# Altium PCB PIC精简开发板.PCBDOC (part 2 of 2)
Units mm, origin at the board's own origin, x right, y up, seen from the top; angles counter-clockwise.
Board outline 152.4 x 101.6 mm, 2 copper layers (Top Layer, Bottom Layer); 40 components, 58 nets, 198 pads, 47 vias.
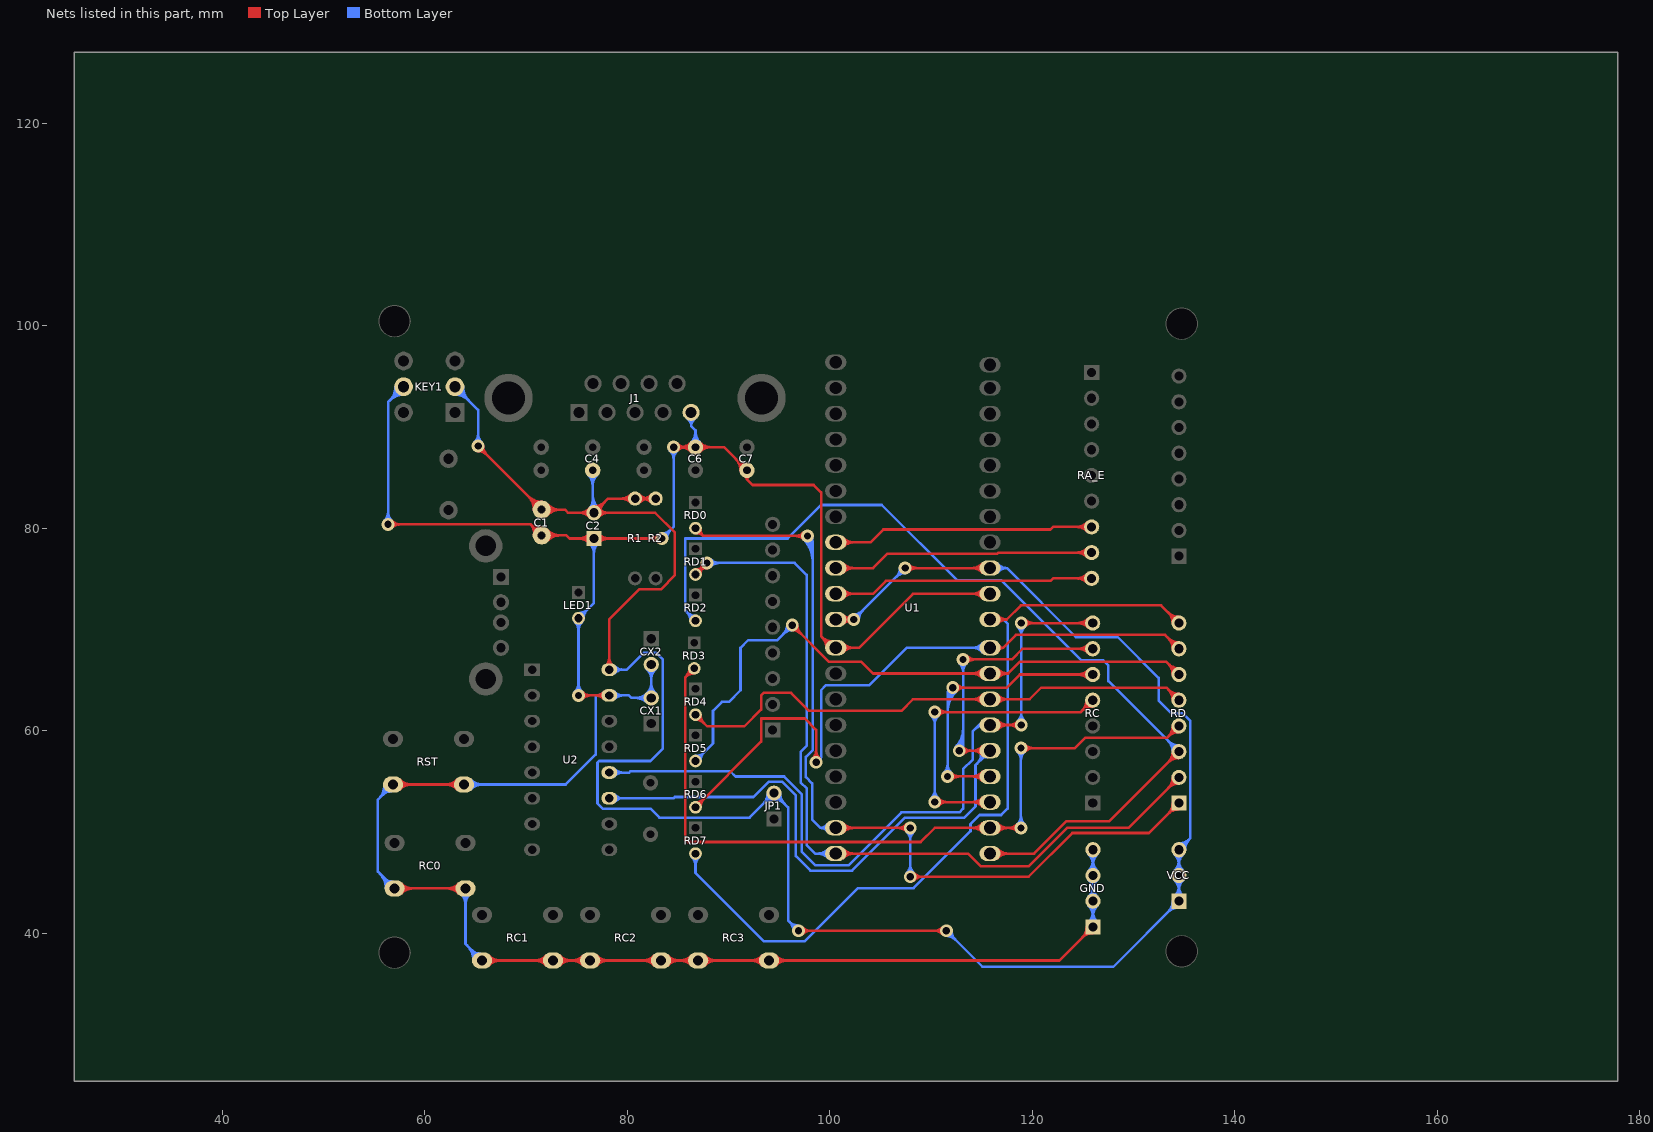
[diagram p2: the nets of this part, all layers, seen from the top]

## Via types
v1: diameter 1.27, hole 0.711, Top Layer to Bottom Layer, 47 vias

## Nets (pads, with @x,y where several pads share a name; then routed paths per layer and width w, separated by ;. In a path a pad name is that pad's centre, name@x,y a point inside that pad or via, vN(x,y) a via of type N, cw(c..) or ccw(c..) an arc to the next point about the centre after c; other vN are vias at no path point) (continued)
RC4: RC.5 U1.23 | length 45.7
  Top Layer w0.254: v1(110.363,52.959) U1.23@115.824,52.959 ; v1(110.363,61.849) 124.787,61.849 RC.5@125.961,63.023 ; v1@110.722,52.6 cw(c111.589,51.733) 111.589,52.959 cw(c111.589,54.185) v1@110.722,53.318 ; v1@110.722,61.49 cw(c111.589,60.623) 111.589,61.849 cw(c111.589,63.075) v1@110.722,62.208 ; U1.23@115.082,52.517 ccw(c114.014,51.449) 114.014,52.959 ccw(c114.014,54.469) U1.23@115.082,53.401 ; U1.23@115.261,52.696 ccw(c114.627,52.062) 114.627,52.959 ccw(c114.627,53.856) U1.23@115.261,53.222 ; RC.5@125.338,63.023 cw(c123.834,63.023) 124.897,61.959 cw(c125.961,60.896) RC.5@125.961,62.4 ; RC.5@125.592,63.023 cw(c124.701,63.023) 125.331,62.393 cw(c125.961,61.763) RC.5@125.961,62.654
  Bottom Layer w0.254: v1@110.004,53.318 ccw(c109.137,54.185) 110.363,54.185 ccw(c111.589,54.185) v1@110.722,53.318 ; v1@110.004,61.49 cw(c109.137,60.623) 110.363,60.623 cw(c111.589,60.623) v1@110.722,61.49 ; v1(110.363,52.959) v1(110.363,61.849)
RC5: RC.6 U1.24 | length 47.9
  Top Layer w0.254: v1(111.633,55.499) U1.24@115.824,55.499 ; v1@111.992,55.14 cw(c112.859,54.273) 112.859,55.499 cw(c112.859,56.725) v1@111.992,55.858 ; v1(112.141,64.262) 117.475,64.262 118.776,65.563 RC.6@125.961,65.563 ; v1@112.5,63.903 cw(c113.367,63.036) 113.367,64.262 cw(c113.367,65.488) v1@112.5,64.621 ; U1.24@115.082,55.057 ccw(c114.014,53.989) 114.014,55.499 ccw(c114.014,57.009) U1.24@115.082,55.941 ; U1.24@115.261,55.236 ccw(c114.627,54.602) 114.627,55.499 ccw(c114.627,56.396) U1.24@115.261,55.762 ; RC.6@125.52,65.122 ccw(c124.457,64.059) 124.457,65.563 ccw(c124.457,67.067) RC.6@125.52,66.004 ; RC.6@125.7,65.302 ccw(c125.07,64.672) 125.07,65.563 ccw(c125.07,66.454) RC.6@125.7,65.824
  Bottom Layer w0.254: v1@111.274,55.858 ccw(c110.407,56.725) 111.633,56.725 ccw(c112.859,56.725) v1@111.992,55.858 ; v1(111.633,55.499) 111.633,63.754 ; 111.633,61.809 cw(c114.594,61.809) v1@112.5,63.903 ; 111.633,62.422 cw(c113.981,62.422) v1@112.321,64.082 ; 111.633,63.036 cw(c113.367,63.036) v1(112.141,64.262) 111.633,63.754 ; 111.633,63.649 cw(c112.754,63.649) v1@111.961,64.442 ; v1@111.683,64.043 cw(c111.453,63.934) 111.633,63.754 ; v1@111.922,63.804 ccw(c111.813,63.574) 111.633,63.754
RC6: RC.7 U1.25 U2.11 | length 100.7
  Top Layer w0.254: v1(112.776,58.039) U1.25@115.824,58.039 ; v1@113.135,57.68 cw(c114.002,56.813) 114.002,58.039 cw(c114.002,59.265) v1@113.135,58.398 ; v1(113.157,67.056) 117.983,67.056 119.03,68.103 RC.7@125.961,68.103 ; v1@113.516,66.697 cw(c114.383,65.83) 114.383,67.056 cw(c114.383,68.282) v1@113.516,67.415 ; U1.25@115.082,57.597 ccw(c114.014,56.529) 114.014,58.039 ccw(c114.014,59.549) U1.25@115.082,58.481 ; U1.25@115.261,57.776 ccw(c114.627,57.142) 114.627,58.039 ccw(c114.627,58.936) U1.25@115.261,58.302 ; RC.7@125.52,67.662 ccw(c124.457,66.599) 124.457,68.103 ccw(c124.457,69.607) RC.7@125.52,68.544 ; RC.7@125.7,67.842 ccw(c125.07,67.212) 125.07,68.103 ccw(c125.07,68.994) RC.7@125.7,68.364
  Bottom Layer w0.254: U2.11@78.228,53.339 84.582,53.339 84.71,53.467 92.468,53.467 93.98,54.979 95.262,54.979 96.647,53.594 96.647,47.63 98.074,46.203 102.21,46.203 107.442,51.435 113.284,51.435 114.391,52.542 114.391,56.606 U1.25@115.824,58.039 ; U2.11@78.743,52.987 cw(c79.593,52.137) 79.593,53.339 cw(c79.593,54.541) U2.11@78.743,53.691 ; v1@112.417,58.398 ccw(c110.63,60.185) 113.157,60.185 ; v1@112.596,58.219 ccw(c111.243,59.572) 113.157,59.572 ; v1@112.798,66.697 cw(c111.931,65.83) 113.157,65.83 cw(c114.383,65.83) v1@113.516,66.697 ; 113.157,58.959 cw(c111.856,58.959) v1(112.776,58.039) 113.157,58.42 v1(113.157,67.056) ; 114.541,56.756 ccw(c113.602,57.694) U1.25@114.908,57.928 ; 114.884,57.099 ccw(c114.185,57.799) U1.25@115.158,57.973 ; 114.969,57.184 cw(c115.524,56.628) U1.25@115.524,57.414
RC7: RC.8 U1.26 U2.12 | length 94.6
  Top Layer w0.254: U1.26@115.824,60.579 v1(118.903,60.579) ; U1.26@116.387,60.316 cw(c117.021,59.682) 117.021,60.579 cw(c117.021,61.476) U1.26@116.387,60.842 ; U1.26@116.566,60.137 cw(c117.634,59.069) 117.634,60.579 cw(c117.634,62.089) U1.26@116.566,61.021 ; v1@118.544,60.22 ccw(c117.677,59.353) 117.677,60.579 ccw(c117.677,61.805) v1@118.544,60.938 ; v1(118.903,70.643) RC.8@125.961,70.643 ; v1@119.262,70.284 cw(c120.129,69.417) 120.129,70.643 cw(c120.129,71.869) v1@119.262,71.002 ; RC.8@125.52,70.202 ccw(c124.457,69.139) 124.457,70.643 ccw(c124.457,72.147) RC.8@125.52,71.084 ; RC.8@125.7,70.382 ccw(c125.07,69.752) 125.07,70.643 ccw(c125.07,71.534) RC.8@125.7,70.904
  Bottom Layer w0.254: U2.12@78.228,55.879 80.187,55.879 80.315,56.007 90.17,56.007 90.69,55.487 95.495,55.487 97.225,53.757 97.225,48.091 98.606,46.711 101.829,46.711 107.061,51.943 112.801,51.943 113.174,52.315 113.174,56.217 114.097,57.14 114.097,59.944 114.732,60.579 ; U2.12@78.743,55.527 cw(c79.593,54.677) 79.593,55.879 cw(c79.593,57.081) U2.12@78.743,56.231 ; 114.312,60.159 cw(c115.163,59.309) U1.26@115.492,60.466 ; 114.618,60.465 cw(c115.298,59.785) U1.26@115.561,60.71 ; U1.26@114.916,60.434 ccw(c114.732,60.39) 114.732,60.579 ; U1.26@114.916,60.724 cw(c114.732,60.768) 114.732,60.579 ; U1.26@115.824,60.579 114.732,60.579 ; v1@118.544,60.938 ccw(c117.677,61.805) 118.903,61.805 ccw(c120.129,61.805) v1@119.262,60.938 ; v1@118.544,70.284 cw(c117.677,69.417) 118.903,69.417 cw(c120.129,69.417) v1@119.262,70.284 ; v1(118.903,60.579) v1(118.903,70.643)
RD0: RD0.2 RD.1 U1.19 | length 112
  Top Layer w0.254: RD0.2@86.741,80.01 87.503,79.248 ; RD0.2@86.781,79.514 cw(c86.855,78.6) 87.503,79.248 ; RD0.2@87.237,79.97 ccw(c88.151,79.896) 87.503,79.248 ; v1@97.431,78.889 ccw(c96.564,78.022) 96.564,79.248 ccw(c96.564,80.474) v1@97.431,79.607 ; v1(97.79,79.248) 87.503,79.248 ; U1.19@100.584,50.419 v1(107.95,50.419) ; U1.19@101.147,50.156 cw(c101.781,49.522) 101.781,50.419 cw(c101.781,51.316) U1.19@101.147,50.682 ; U1.19@101.326,49.977 cw(c102.394,48.909) 102.394,50.419 cw(c102.394,51.929) U1.19@101.326,50.861 ; v1@107.591,50.06 ccw(c106.724,49.193) 106.724,50.419 ccw(c106.724,51.645) v1@107.591,50.778 ; v1(107.95,45.593) 119.634,45.593 123.952,49.911 131.519,49.911 RD.1@134.471,52.863 ; v1@108.309,45.234 cw(c109.176,44.367) 109.176,45.593 cw(c109.176,46.819) v1@108.309,45.952 ; RD.1@133.848,52.863 cw(c132.344,52.863) 133.407,51.799 cw(c134.471,50.736) RD.1@134.471,52.24 ; RD.1@134.102,52.863 cw(c133.211,52.863) 133.841,52.233 cw(c134.471,51.603) RD.1@134.471,52.494
  Bottom Layer w0.254: v1@97.431,78.889 cw(c95.337,76.795) 98.298,76.795 ; v1@97.61,79.068 cw(c95.95,77.408) 98.298,77.408 ; v1@97.97,79.428 cw(c97.177,78.635) 98.298,78.635 ; v1@98.009,78.79 cw(c98.118,78.56) 98.298,78.74 ; v1@98.248,79.029 ccw(c98.478,78.92) 98.298,78.74 ; 98.298,78.022 ccw(c96.564,78.022) v1(97.79,79.248) 98.298,78.74 ; U1.19@99.777,50.053 ccw(c99.06,49.534) 99.06,50.419 ; U1.19@99.777,50.785 cw(c99.06,51.304) 99.06,50.419 ; U1.19@100.584,50.419 99.06,50.419 ; v1@107.591,45.952 ccw(c106.724,46.819) 107.95,46.819 ccw(c109.176,46.819) v1@108.309,45.952 ; v1@107.591,50.06 cw(c106.724,49.193) 107.95,49.193 cw(c109.176,49.193) v1@108.309,50.06 ; v1(107.95,45.593) v1(107.95,50.419) ; 98.298,78.74 98.298,58.074 97.638,57.414 97.638,55.418 98.247,54.809 98.247,51.232 99.06,50.419
RD1: RD1.2 RD.2 U1.20 | length 97.4
  Top Layer w0.254: RD1.2@86.741,75.438 v1(87.884,76.581) ; RD1.2@86.741,75.936 ccw(c86.741,77.138) 87.591,76.288 ccw(c88.441,75.438) RD1.2@87.239,75.438 ; v1@87.376,76.581 cw(c86.15,76.581) 87.017,75.714 cw(c87.884,74.847) v1@87.884,76.073 ; U1.20@100.584,47.879 113.665,47.879 114.935,46.609 119.634,46.609 123.444,50.419 129.487,50.419 RD.2@134.471,55.403 ; U1.20@101.147,47.616 cw(c101.781,46.982) 101.781,47.879 cw(c101.781,48.776) U1.20@101.147,48.142 ; U1.20@101.326,47.437 cw(c102.394,46.369) 102.394,47.879 cw(c102.394,49.389) U1.20@101.326,48.321 ; RD.2@133.848,55.403 cw(c132.344,55.403) 133.407,54.339 cw(c134.471,53.276) RD.2@134.471,54.78 ; RD.2@134.102,55.403 cw(c133.211,55.403) 133.841,54.773 cw(c134.471,54.143) RD.2@134.471,55.034
  Bottom Layer w0.254: v1(87.884,76.581) 96.52,76.581 97.714,75.387 97.714,58.517 97.119,57.922 97.119,54.91 97.733,54.296 97.733,48.698 98.552,47.879 U1.20@100.584,47.879 ; v1@88.243,76.222 cw(c89.11,75.355) 89.11,76.581 cw(c89.11,77.807) v1@88.243,76.94 ; U1.20@99.842,47.437 ccw(c98.774,46.369) 98.774,47.879 ccw(c98.774,49.389) U1.20@99.842,48.321 ; U1.20@100.021,47.616 ccw(c99.387,46.982) 99.387,47.879 ccw(c99.387,48.776) U1.20@100.021,48.142
RD2: RD2.2 RD.3 U1.21 | length 105.6
  Top Layer w0.254: U1.21@115.824,47.879 120.167,47.879 123.342,51.054 127.582,51.054 RD.3@134.471,57.943 ; U1.21@116.387,47.616 cw(c117.021,46.982) 117.021,47.879 cw(c117.021,48.776) U1.21@116.387,48.142 ; U1.21@116.566,47.437 cw(c117.634,46.369) 117.634,47.879 cw(c117.634,49.389) U1.21@116.566,48.321 ; RD.3@133.848,57.943 cw(c132.344,57.943) 133.407,56.879 cw(c134.471,55.816) RD.3@134.471,57.32 ; RD.3@134.102,57.943 cw(c133.211,57.943) 133.841,57.313 cw(c134.471,56.683) RD.3@134.471,57.574
  Bottom Layer w0.254: RD2.2@86.243,70.866 ccw(c85.041,70.866) 85.891,71.716 ccw(c86.741,72.566) RD2.2@86.741,71.364 ; RD2.2@86.741,70.866 85.735,71.872 85.735,78.994 95.841,78.994 99.143,82.296 105.131,82.296 112.547,74.879 116.916,74.879 124.841,66.954 127,66.954 127.508,66.446 127.508,64.906 RD.3@134.471,57.943 ; RD.3@133.848,57.943 ccw(c132.344,57.943) 133.407,59.007 ccw(c134.471,60.07) RD.3@134.471,58.566 ; RD.3@134.102,57.943 ccw(c133.211,57.943) 133.841,58.573 ccw(c134.471,59.203) RD.3@134.471,58.312
RD3: RD3.2 RD.4 U1.22 | length 96.4
  Top Layer w0.254: RD3.2@86.116,66.167 cw(c84.914,66.167) 85.764,65.317 cw(c86.614,64.467) RD3.2@86.614,65.669 ; RD3.2@86.614,66.167 85.725,65.278 85.725,49.276 85.979,49.022 108.966,49.022 110.363,50.419 U1.22@115.824,50.419 v1(118.872,50.419) ; U1.22@115.082,49.977 ccw(c114.014,48.909) 114.014,50.419 ccw(c114.014,51.929) U1.22@115.082,50.861 ; U1.22@115.261,50.156 ccw(c114.627,49.522) 114.627,50.419 ccw(c114.627,51.316) U1.22@115.261,50.682 ; U1.22@116.387,50.156 cw(c117.021,49.522) 117.021,50.419 cw(c117.021,51.316) U1.22@116.387,50.682 ; U1.22@116.566,49.977 cw(c117.634,48.909) 117.634,50.419 cw(c117.634,51.929) U1.22@116.566,50.861 ; v1@118.513,50.06 ccw(c117.646,49.193) 117.646,50.419 ccw(c117.646,51.645) v1@118.513,50.778 ; v1(118.872,58.293) 124.206,58.293 125.222,59.309 133.297,59.309 RD.4@134.471,60.483 ; v1@119.231,57.934 cw(c120.098,57.067) 120.098,58.293 cw(c120.098,59.519) v1@119.231,58.652 ; RD.4@133.848,60.483 cw(c132.344,60.483) 133.407,59.419 cw(c134.471,58.356) RD.4@134.471,59.86 ; RD.4@134.102,60.483 cw(c133.211,60.483) 133.841,59.853 cw(c134.471,59.223) RD.4@134.471,60.114
  Bottom Layer w0.254: v1@118.513,50.778 ccw(c117.646,51.645) 118.872,51.645 ccw(c120.098,51.645) v1@119.231,50.778 ; v1@118.513,57.934 cw(c117.646,57.067) 118.872,57.067 cw(c120.098,57.067) v1@119.231,57.934 ; v1(118.872,50.419) v1(118.872,58.293)
RD4: RD4.2 RD.5 U1.27 | length 65.8
  Top Layer w0.254: RD4.2@86.741,61.097 cw(c86.741,59.895) 87.591,60.745 cw(c88.441,61.595) RD4.2@87.239,61.595 ; RD4.2@86.741,61.595 87.884,60.452 91.567,60.452 93.218,62.103 93.218,63.5 93.472,63.754 96.19,63.754 97.968,61.976 107.061,61.976 108.204,63.119 U1.27@115.824,63.119 119.736,63.119 120.879,64.262 133.232,64.262 RD.5@134.471,63.023 ; U1.27@115.082,62.677 ccw(c114.014,61.609) 114.014,63.119 ccw(c114.014,64.629) U1.27@115.082,63.561 ; U1.27@115.261,62.856 ccw(c114.627,62.222) 114.627,63.119 ccw(c114.627,64.016) U1.27@115.261,63.382 ; U1.27@116.387,62.856 cw(c117.021,62.222) 117.021,63.119 cw(c117.021,64.016) U1.27@116.387,63.382 ; U1.27@116.566,62.677 cw(c117.634,61.609) 117.634,63.119 cw(c117.634,64.629) U1.27@116.566,63.561 ; RD.5@133.848,63.023 ccw(c132.344,63.023) 133.407,64.087 ccw(c134.471,65.15) RD.5@134.471,63.646 ; RD.5@134.102,63.023 ccw(c133.211,63.023) 133.841,63.653 ccw(c134.471,64.283) RD.5@134.471,63.392
RD5: RD5.2 RD.6 U1.28 | length 77.5
  Top Layer w0.254: v1@96.291,69.926 cw(c96.291,68.7) 97.159,69.567 cw(c98.026,70.434) v1@96.799,70.434 ; v1(96.291,70.434) 99.924,66.802 103.124,66.802 104.267,65.659 U1.28@115.824,65.659 117.602,65.659 ; U1.28@115.082,65.217 ccw(c114.014,64.149) 114.014,65.659 ccw(c114.014,67.169) U1.28@115.082,66.101 ; U1.28@115.261,65.396 ccw(c114.627,64.762) 114.627,65.659 ccw(c114.627,66.556) U1.28@115.261,65.922 ; U1.28@116.391,65.4 cw(c117.002,64.808) 117.002,65.659 cw(c117.002,66.51) U1.28@116.391,65.918 ; U1.28@116.573,65.224 cw(c117.602,64.225) 117.602,65.659 ; U1.28@116.573,66.094 ccw(c117.602,67.093) 117.602,65.659 ; RD.6@133.848,65.563 ccw(c132.344,65.563) 133.407,66.627 ccw(c134.471,67.69) RD.6@134.471,66.186 ; RD.6@134.102,65.563 ccw(c133.211,65.563) 133.841,66.193 ccw(c134.471,66.823) RD.6@134.471,65.932 ; RD.6@134.471,65.563 133.232,66.802 118.745,66.802 117.602,65.659
  Bottom Layer w0.254: RD5.2@86.741,57.023 88.468,58.75 88.468,61.976 89.357,62.865 90.043,62.865 91.186,64.008 91.186,68.199 91.948,68.961 94.818,68.961 v1(96.291,70.434) ; RD5.2@86.741,57.521 ccw(c86.741,58.723) 87.591,57.873 ccw(c88.441,57.023) RD5.2@87.239,57.023 ; v1@95.783,70.434 cw(c94.557,70.434) 95.424,69.567 cw(c96.291,68.7) v1@96.291,69.926
RD6: RD6.2 RD.7 U1.29 | length 79
  Top Layer w0.254: RD6.2@86.741,52.451 93.218,58.928 93.218,61.214 97.536,61.214 98.654,60.096 v1(98.654,56.896) ; RD6.2@86.741,52.949 ccw(c86.741,54.151) 87.591,53.301 ccw(c88.441,52.451) RD6.2@87.239,52.451 ; v1@98.294,57.255 ccw(c97.427,58.122) 98.654,58.122 ccw(c99.88,58.122) v1@99.013,57.255 ; U1.29@115.824,68.199 117.119,68.199 ; U1.29@116.687,67.928 cw(c117.119,67.72) 117.119,68.199 ; U1.29@116.687,68.47 ccw(c117.119,68.678) 117.119,68.199 ; RD.7@133.848,68.103 ccw(c132.344,68.103) 133.407,69.167 ccw(c134.471,70.23) RD.7@134.471,68.726 ; RD.7@134.102,68.103 ccw(c133.211,68.103) 133.841,68.733 ccw(c134.471,69.363) RD.7@134.471,68.472 ; RD.7@134.471,68.103 133.105,69.469 118.389,69.469 117.119,68.199
  Bottom Layer w0.254: v1(98.654,56.896) 99.136,57.379 ; v1@98.895,57.343 ccw(c98.992,57.523) 99.136,57.379 ; v1@99.101,57.137 cw(c99.281,57.234) 99.136,57.379 ; U1.29@115.082,67.757 ccw(c114.014,66.689) 114.014,68.199 ccw(c114.014,69.709) U1.29@115.082,68.641 ; U1.29@115.261,67.936 ccw(c114.627,67.302) 114.627,68.199 ccw(c114.627,69.096) U1.29@115.261,68.462 ; U1.29@115.824,68.199 107.594,68.199 103.911,64.516 99.644,64.516 99.136,64.008 99.136,57.379
RD7: RD7.2 RD.8 U1.30 | length 91.4
  Top Layer w0.254: U1.30@115.82,70.992 117.474,70.992 ; U1.30@116.403,70.751 cw(c116.924,70.308) 116.924,70.992 cw(c116.924,71.676) U1.30@116.403,71.233 ; U1.30@116.596,70.587 cw(c117.474,69.84) 117.474,70.992 ; U1.30@116.596,71.397 ccw(c117.474,72.144) 117.474,70.992 ; RD.8@133.848,70.643 ccw(c132.344,70.643) 133.407,71.707 ccw(c134.471,72.77) RD.8@134.471,71.266 ; RD.8@134.102,70.643 ccw(c133.211,70.643) 133.841,71.273 ccw(c134.471,71.903) RD.8@134.471,71.012 ; RD.8@134.471,70.643 132.724,72.39 118.872,72.39 117.474,70.992
  Bottom Layer w0.254: RD7.2@86.389,47.527 cw(c85.539,46.677) 86.741,46.677 cw(c87.943,46.677) RD7.2@87.093,47.527 ; RD7.2@86.741,47.879 86.741,45.974 93.472,39.243 97.536,39.243 102.768,44.475 108.28,44.475 113.894,50.089 113.894,50.8 114.783,51.689 116.916,51.689 117.551,52.324 117.551,70.586 117.145,70.992 ; U1.30@115.82,70.992 117.145,70.992 ; U1.30@116.676,70.706 cw(c117.145,70.465) 117.145,70.992 ; U1.30@116.676,71.278 ccw(c117.145,71.519) 117.145,70.992
RE0: RA_E.7 U1.8 | length 33.5
  Top Layer w0.254: U1.8@100.58,78.612 104.014,78.612 105.285,79.883 121.793,79.883 122.047,80.137 RA_E.7@125.857,80.137 ; U1.8@101.143,78.349 cw(c101.777,77.715) 101.777,78.612 cw(c101.777,79.509) U1.8@101.143,78.875 ; U1.8@101.322,78.17 cw(c102.39,77.102) 102.39,78.612 cw(c102.39,80.122) U1.8@101.322,79.054 ; RA_E.7@125.416,79.696 ccw(c124.353,78.633) 124.353,80.137 ccw(c124.353,81.641) RA_E.7@125.416,80.578 ; RA_E.7@125.596,79.876 ccw(c124.966,79.246) 124.966,80.137 ccw(c124.966,81.028) RA_E.7@125.596,80.398
RE1: RA_E.8 U1.9 | length 33.5
  Top Layer w0.254: U1.9@100.58,76.072 104.266,76.072 105.664,77.47 116.51,77.47 116.637,77.597 RA_E.8@125.857,77.597 ; U1.9@101.143,75.809 cw(c101.777,75.175) 101.777,76.072 cw(c101.777,76.969) U1.9@101.143,76.335 ; U1.9@101.322,75.63 cw(c102.39,74.562) 102.39,76.072 cw(c102.39,77.582) U1.9@101.322,76.514 ; RA_E.8@125.416,77.156 ccw(c124.353,76.093) 124.353,77.597 ccw(c124.353,79.101) RA_E.8@125.416,78.038 ; RA_E.8@125.596,77.336 ccw(c124.966,76.706) 124.966,77.597 ccw(c124.966,78.488) RA_E.8@125.596,77.858
RE2: RA_E.9 U1.10 | length 33.5
  Top Layer w0.254: U1.10@100.58,73.532 104.266,73.532 105.537,74.803 121.793,74.803 122.047,75.057 RA_E.9@125.857,75.057 ; U1.10@101.143,73.269 cw(c101.777,72.635) 101.777,73.532 cw(c101.777,74.429) U1.10@101.143,73.795 ; U1.10@101.322,73.09 cw(c102.39,72.022) 102.39,73.532 cw(c102.39,75.042) U1.10@101.322,73.974 ; RA_E.9@125.416,74.616 ccw(c124.353,73.553) 124.353,75.057 ccw(c124.353,76.561) RA_E.9@125.416,75.498 ; RA_E.9@125.596,74.796 ccw(c124.966,74.166) 124.966,75.057 ccw(c124.966,75.948) RA_E.9@125.596,75.318
VDD: C1.1 C2.2 C4.2 JP1.2 KEY1.2 R1.1 R2.2 U1.11 U1.32 U2.16 VCC.1 VCC.2 VCC.3 | length 330.5
  Top Layer w0.254: v1@65.278,87.605 cw(c65.278,86.378) 66.145,87.245 cw(c67.012,88.113) v1@65.786,88.113 ; v1(65.278,88.113) C1.1@71.552,81.839 73.838,81.839 74.143,81.534 C2.2@76.708,81.534 ; C1.1@70.779,81.839 ccw(c68.913,81.839) 70.232,83.158 ccw(c71.552,84.478) C1.1@71.552,82.612 ; C1.1@71.033,81.839 ccw(c69.78,81.839) 70.666,82.725 ccw(c71.552,83.611) C1.1@71.552,82.358 ; C1.1@71.919,81.472 cw(c72.805,80.586) 72.805,81.839 cw(c72.805,83.092) C1.1@71.919,82.206 ; C1.1@72.098,81.292 cw(c73.418,79.973) 73.418,81.839 cw(c73.418,83.705) C1.1@72.098,82.385 ; C2.2@76.267,81.093 ccw(c75.204,80.03) 75.204,81.534 ccw(c75.204,83.038) C2.2@76.267,81.975 ; C2.2@76.447,81.273 ccw(c75.817,80.643) 75.817,81.534 ccw(c75.817,82.425) C2.2@76.447,81.795 ; C2.2@76.708,81.903 ccw(c76.708,82.794) 77.338,82.164 ccw(c77.968,81.534) C2.2@77.077,81.534 ; C2.2@76.708,82.157 ccw(c76.708,83.661) 77.772,82.598 ccw(c78.835,81.534) C2.2@77.331,81.534 ; C2.2@76.969,81.273 cw(c77.599,80.643) 77.599,81.534 cw(c77.599,82.425) C2.2@76.969,81.795 ; C2.2@77.149,81.093 cw(c78.212,80.03) 78.212,81.534 cw(c78.212,83.038) C2.2@77.149,81.975 ; U2.16@77.876,66.391 ccw(c77.078,67.189) 78.207,67.189 ; 78.207,66.68 ccw(c78.869,66.68) U2.16@78.401,66.212 ; 78.207,67.293 ccw(c79.483,67.293) U2.16@78.58,66.391 ; U2.16@78.228,66.039 78.207,66.039 78.207,71.004 81.178,73.976 83.312,73.976 84.709,75.373 84.709,79.578 82.753,81.534 C2.2@76.708,81.534 ; R1.1@80.367,82.526 ccw(c79.389,81.548) 79.389,82.931 ccw(c79.389,84.314) R1.1@80.367,83.336 ; R1.1@80.546,82.705 ccw(c80.002,82.161) 80.002,82.931 ccw(c80.002,83.701) R1.1@80.546,83.157 ; R1.1@80.998,82.705 cw(c81.542,82.161) 81.542,82.931 cw(c81.542,83.701) R1.1@80.998,83.157 ; R1.1@81.177,82.526 cw(c82.155,81.548) 82.155,82.931 cw(c82.155,84.314) R1.1@81.177,83.336 ; R2.2@82.399,82.526 ccw(c81.421,81.548) 81.421,82.931 ccw(c81.421,84.314) R2.2@82.399,83.336 ; R2.2@82.578,82.705 ccw(c82.034,82.161) 82.034,82.931 ccw(c82.034,83.701) R2.2@82.578,83.157 ; R2.2@82.804,82.931 R1.1@80.772,82.931 78.105,82.931 C2.2@76.708,81.534 ; v1(96.901,40.259) v1(111.506,40.259) ; v1@97.26,39.9 cw(c98.127,39.033) 98.127,40.259 cw(c98.127,41.485) v1@97.26,40.618 ; U1.11@100.58,70.992 v1(102.362,70.992) ; U1.11@101.146,70.733 cw(c101.76,70.135) 101.76,70.992 cw(c101.76,71.849) U1.11@101.146,71.251 ; U1.11@101.328,70.556 cw(c102.362,69.549) v1(102.362,70.992) ; U1.11@101.328,71.428 ccw(c102.362,72.435) v1(102.362,70.992) ; v1@102.003,70.633 ccw(c101.136,69.766) 101.136,70.992 ccw(c101.136,72.218) v1@102.003,71.351 ; v1(107.442,76.072) U1.32@115.82,76.072 ; v1@107.801,75.713 cw(c108.668,74.846) 108.668,76.072 cw(c108.668,77.298) v1@107.801,76.431 ; v1@111.147,39.9 ccw(c110.28,39.033) 110.28,40.259 ccw(c110.28,41.485) v1@111.147,40.618 ; U1.32@115.078,75.63 ccw(c114.01,74.562) 114.01,76.072 ccw(c114.01,77.582) U1.32@115.078,76.514 ; U1.32@115.258,75.809 ccw(c114.624,75.175) 114.624,76.072 ccw(c114.624,76.969) U1.32@115.258,76.335
  Bottom Layer w0.254: KEY1.2@62.992,93.182 cw(c62.992,91.255) 64.354,92.618 cw(c65.717,93.98) KEY1.2@63.79,93.98 ; KEY1.2@62.992,93.436 cw(c62.992,92.123) 63.921,93.051 cw(c64.849,93.98) KEY1.2@63.536,93.98 ; KEY1.2@62.992,93.98 65.278,91.694 v1(65.278,88.113) ; v1@64.919,88.472 ccw(c64.052,89.339) 65.278,89.339 ccw(c66.504,89.339) v1@65.637,88.472 ; C4.2@76.132,85.276 cw(c75.048,84.192) 76.581,84.192 cw(c78.114,84.192) C4.2@77.03,85.276 ; C2.2@76.267,81.975 ccw(c75.511,82.731) 76.581,82.731 ccw(c77.905,82.731) C2.2@76.969,81.795 ; C4.2@76.312,85.456 cw(c75.661,84.805) 76.581,84.805 cw(c77.501,84.805) C4.2@76.85,85.456 ; 76.581,83.345 ccw(c78.519,83.345) C2.2@77.149,81.975 ; C4.2@76.581,85.725 76.581,81.661 C2.2@76.708,81.534 ; U2.16@78.228,66.039 79.959,66.039 81.611,67.691 82.88,67.691 83.515,67.056 83.515,58.242 82.296,57.023 77.216,57.023 77.06,56.867 77.06,52.832 77.568,52.324 82.296,52.324 83.185,51.435 92.075,51.435 JP1.2@94.488,53.848 95.885,52.451 95.885,41.275 v1(96.901,40.259) ; U2.16@78.743,65.687 cw(c79.593,64.837) 79.593,66.039 cw(c79.593,67.241) U2.16@78.743,66.391 ; JP1.2@93.865,53.848 cw(c92.361,53.848) 93.424,52.784 cw(c94.488,51.721) 94.488,53.225 cw(c94.488,51.721) 95.552,52.784 cw(c96.615,53.848) JP1.2@95.111,53.848 ; JP1.2@94.119,53.848 cw(c93.228,53.848) 93.858,53.218 cw(c94.488,52.588) 94.488,53.479 cw(c94.488,52.588) 95.118,53.218 cw(c95.748,53.848) JP1.2@94.857,53.848 ; v1@96.393,40.259 ccw(c95.167,40.259) 96.034,41.126 ccw(c96.901,41.993) v1@96.901,40.767 ; v1(102.362,70.992) v1(107.442,76.072) ; v1@102.362,71.5 ccw(c102.362,72.726) 103.229,71.859 ccw(c104.096,70.992) v1@102.87,70.992 ; v1@106.934,76.072 cw(c105.708,76.072) 106.575,75.205 cw(c107.442,74.338) v1@107.442,75.564 ; v1@111.506,39.751 cw(c111.506,38.525) 112.373,39.392 cw(c113.24,40.259) v1@112.014,40.259 ; v1(111.506,40.259) 115.062,36.703 127.994,36.703 VCC.1@134.471,43.18 VCC.2@134.471,45.72 VCC.3@134.471,48.26 135.611,49.4 135.611,60.96 134.823,61.747 133.706,61.747 132.461,62.992 132.461,65.227 128.448,69.24 124.308,69.24 117.476,76.072 ; U1.32@115.82,76.072 117.476,76.072 ; U1.32@116.403,75.831 cw(c116.925,75.385) 116.925,76.072 cw(c116.925,76.759) U1.32@116.403,76.313 ; U1.32@116.596,75.666 cw(c117.476,74.915) 117.476,76.072 ; U1.32@116.596,76.478 ccw(c117.476,77.229) 117.476,76.072 ; VCC.1@133.848,43.18 cw(c132.344,43.18) 133.407,42.116 cw(c134.471,41.053) VCC.1@134.471,42.557 ; VCC.1@134.03,43.621 ccw(c132.967,44.684) 134.471,44.684 ccw(c135.975,44.684) VCC.1@134.912,43.621 ; VCC.2@134.03,45.279 cw(c132.967,44.216) 134.471,44.216 cw(c135.975,44.216) VCC.2@134.912,45.279 ; VCC.2@134.03,46.161 ccw(c132.967,47.224) 134.471,47.224 ccw(c135.975,47.224) VCC.2@134.912,46.161 ; VCC.3@134.03,47.819 cw(c132.967,46.756) 134.471,46.756 cw(c135.975,46.756) VCC.3@134.912,47.819 ; VCC.1@134.102,43.18 cw(c133.211,43.18) 133.841,42.55 cw(c134.471,41.92) VCC.1@134.471,42.811 ; VCC.1@134.21,43.441 ccw(c133.58,44.071) 134.471,44.071 ccw(c135.362,44.071) VCC.1@134.732,43.441 ; VCC.2@134.21,45.459 cw(c133.58,44.829) 134.471,44.829 cw(c135.362,44.829) VCC.2@134.732,45.459 ; VCC.2@134.21,45.981 ccw(c133.58,46.611) 134.471,46.611 ccw(c135.362,46.611) VCC.2@134.732,45.981 ; VCC.3@134.21,47.999 cw(c133.58,47.369) 134.471,47.369 cw(c135.362,47.369) VCC.3@134.732,47.999 ; VCC.3@134.471,48.629 ccw(c134.471,49.52) 135.101,48.89 ccw(c135.731,48.26) VCC.3@134.84,48.26 ; VCC.3@134.471,48.883 ccw(c134.471,50.387) 135.535,49.324 ccw(c136.598,48.26) VCC.3@135.094,48.26
VSS: C1.2 C2.1 C6.1 C7.2 CX1.2 CX2.2 GND.1 GND.2 GND.3 GND.4 J1.5 KEY1.5 LED1.2 RC0.1 RC1.1 RC2.1 RC3.1 RST.2 U1.12 U1.31 U2.15 | length 455.7
  Top Layer w0.254: v1(56.388,80.391) 70.46,80.391 ; v1@56.747,80.032 cw(c57.614,79.165) 57.614,80.391 cw(c57.614,81.617) v1@56.747,80.75 ; RST.2@56.873,54.697 RST.2@63.873,54.697 ; RC0.1@57.031,44.435 RC0.1@64.031,44.435 ; RST.2@57.369,54.401 cw(c58.085,53.685) 58.085,54.697 cw(c58.085,55.708) RST.2@57.369,54.993 ; RC0.1@57.527,44.139 cw(c58.243,43.424) 58.243,44.435 cw(c58.243,45.447) RC0.1@57.527,44.731 ; RST.2@57.549,54.221 cw(c58.698,53.072) 58.698,54.697 cw(c58.698,56.322) RST.2@57.549,55.173 ; RC0.1@57.707,43.959 cw(c58.856,42.81) 58.856,44.435 cw(c58.856,46.06) RC0.1@57.707,44.911 ; RST.2@63.197,54.221 ccw(c62.048,53.072) 62.048,54.697 ccw(c62.048,56.322) RST.2@63.197,55.173 ; RC0.1@63.355,43.959 ccw(c62.206,42.81) 62.206,44.435 ccw(c62.206,46.06) RC0.1@63.355,44.911 ; RST.2@63.377,54.401 ccw(c62.661,53.685) 62.661,54.697 ccw(c62.661,55.708) RST.2@63.377,54.993 ; RC0.1@63.535,44.139 ccw(c62.819,43.424) 62.819,44.435 ccw(c62.819,45.447) RC0.1@63.535,44.731 ; RC1.1@65.667,37.323 RC1.1@72.667,37.323 RC2.1@76.335,37.323 RC2.1@83.335,37.323 RC3.1@87.003,37.323 RC3.1@94.003,37.323 122.667,37.323 GND.1@125.984,40.64 ; RC1.1@66.163,37.027 cw(c66.879,36.312) 66.879,37.323 cw(c66.879,38.335) RC1.1@66.163,37.619 ; RC1.1@66.343,36.847 cw(c67.492,35.698) 67.492,37.323 cw(c67.492,38.948) RC1.1@66.343,37.799 ; C1.2@70.787,79.409 ccw(c69.642,79.573) 70.46,80.391 ; C1.2@71.038,79.373 ccw(c70.269,79.483) 70.819,80.032 ccw(c71.368,80.581) C1.2@71.478,79.813 ; C1.2@71.442,80.064 cw(c71.277,81.209) 70.46,80.391 ; C1.2@71.919,78.932 cw(c72.805,78.046) 72.805,79.299 cw(c72.805,80.552) C1.2@71.919,79.666 ; RC1.1@71.991,36.847 ccw(c70.842,35.698) 70.842,37.323 ccw(c70.842,38.948) RC1.1@71.991,37.799 ; C1.2@72.098,78.752 cw(c73.418,77.433) 73.418,79.299 cw(c73.418,81.165) C1.2@72.098,79.845 ; RC1.1@72.171,37.027 ccw(c71.455,36.312) 71.455,37.323 ccw(c71.455,38.335) RC1.1@72.171,37.619 ; RC1.1@73.163,37.027 cw(c73.879,36.312) 73.879,37.323 cw(c73.879,38.335) RC1.1@73.163,37.619 ; RC1.1@73.343,36.847 cw(c74.492,35.698) 74.492,37.323 cw(c74.492,38.948) RC1.1@73.343,37.799 ; v1(75.184,63.499) U2.15@78.228,63.499 ; v1@75.543,63.14 cw(c76.41,62.273) 76.41,63.499 cw(c76.41,64.725) v1@75.543,63.858 ; RC2.1@75.659,36.847 ccw(c74.51,35.698) 74.51,37.323 ccw(c74.51,38.948) RC2.1@75.659,37.799 ; RC2.1@75.839,37.027 ccw(c75.123,36.312) 75.123,37.323 ccw(c75.123,38.335) RC2.1@75.839,37.619 ; C2.1@76.267,78.553 ccw(c75.204,77.49) 75.204,78.994 ccw(c75.204,80.498) C2.1@76.267,79.435 ; C2.1@76.447,78.733 ccw(c75.817,78.103) 75.817,78.994 ccw(c75.817,79.885) C2.1@76.447,79.255 ; RC2.1@76.831,37.027 cw(c77.547,36.312) 77.547,37.323 cw(c77.547,38.335) RC2.1@76.831,37.619 ; C2.1@76.969,78.733 cw(c77.599,78.103) 77.599,78.994 cw(c77.599,79.885) C2.1@76.969,79.255 ; RC2.1@77.011,36.847 cw(c78.16,35.698) 78.16,37.323 cw(c78.16,38.948) RC2.1@77.011,37.799 ; C2.1@77.149,78.553 cw(c78.212,77.49) 78.212,78.994 cw(c78.212,80.498) C2.1@77.149,79.435 ; U2.15@77.714,63.147 ccw(c76.864,62.297) 76.864,63.499 ccw(c76.864,64.701) U2.15@77.714,63.851 ; RC2.1@82.659,36.847 ccw(c81.51,35.698) 81.51,37.323 ccw(c81.51,38.948) RC2.1@82.659,37.799 ; RC2.1@82.839,37.027 ccw(c82.123,36.312) 82.123,37.323 ccw(c82.123,38.335) RC2.1@82.839,37.619 ; v1@83.08,78.635 ccw(c82.213,77.768) 82.213,78.994 ccw(c82.213,80.22) v1@83.08,79.353 ; v1(83.439,78.994) C2.1@76.708,78.994 74.295,78.994 73.99,79.299 C1.2@71.552,79.299 70.46,80.391 ; RC2.1@83.831,37.027 cw(c84.547,36.312) 84.547,37.323 cw(c84.547,38.335) RC2.1@83.831,37.619 ; RC2.1@84.011,36.847 cw(c85.16,35.698) 85.16,37.323 cw(c85.16,38.948) RC2.1@84.011,37.799 ; v1(84.582,88.011) C6.1@86.741,88.011 89.535,88.011 C7.2@91.821,85.725 91.821,84.836 ; v1@84.941,87.652 cw(c85.808,86.785) 85.808,88.011 cw(c85.808,89.237) v1@84.941,88.37 ; C6.1@86.292,87.562 ccw(c85.208,86.478) 85.208,88.011 ccw(c85.208,89.544) C6.1@86.292,88.46 ; RC3.1@86.327,36.847 ccw(c85.178,35.698) 85.178,37.323 ccw(c85.178,38.948) RC3.1@86.327,37.799 ; C6.1@86.472,87.742 ccw(c85.821,87.091) 85.821,88.011 ccw(c85.821,88.931) C6.1@86.472,88.28 ; RC3.1@86.507,37.027 ccw(c85.791,36.312) 85.791,37.323 ccw(c85.791,38.335) RC3.1@86.507,37.619 ; C6.1@87.01,87.742 cw(c87.661,87.091) 87.661,88.011 cw(c87.661,88.931) C6.1@87.01,88.28 ; C6.1@87.19,87.562 cw(c88.274,86.478) 88.274,88.011 cw(c88.274,89.544) C6.1@87.19,88.46 ; RC3.1@87.499,37.027 cw(c88.215,36.312) 88.215,37.323 cw(c88.215,38.335) RC3.1@87.499,37.619 ; RC3.1@87.679,36.847 cw(c88.828,35.698) 88.828,37.323 cw(c88.828,38.948) RC3.1@87.679,37.799 ; C7.2@91.186,85.725 ccw(c89.653,85.725) 90.737,86.809 ccw(c91.821,87.893) C7.2@91.821,86.36 ; C7.2@91.44,85.725 ccw(c90.52,85.725) 91.171,86.375 ccw(c91.821,87.026) C7.2@91.821,86.106 ; RC3.1@93.327,36.847 ccw(c92.178,35.698) 92.178,37.323 ccw(c92.178,38.948) RC3.1@93.327,37.799 ; RC3.1@93.507,37.027 ccw(c92.791,36.312) 92.791,37.323 ccw(c92.791,38.335) RC3.1@93.507,37.619 ; RC3.1@94.499,37.027 cw(c95.215,36.312) 95.215,37.323 cw(c95.215,38.335) RC3.1@94.499,37.619 ; RC3.1@94.679,36.847 cw(c95.828,35.698) 95.828,37.323 cw(c95.828,38.948) RC3.1@94.679,37.799 ; 99.208,69.27 ccw(c100.284,70.346) U1.12@100.284,68.824 ; 99.22,69.258 cw(c98.16,68.199) U1.12@99.659,68.199 ; 99.642,68.836 ccw(c100.284,69.479) U1.12@100.284,68.57 ; 99.653,68.825 cw(c99.028,68.199) U1.12@99.913,68.199 ; U1.12@101.147,67.936 cw(c101.781,67.302) 101.781,68.199 cw(c101.781,69.096) U1.12@101.147,68.462 ; U1.12@101.326,67.757 cw(c102.394,66.689) 102.394,68.199 cw(c102.394,69.709) U1.12@101.326,68.641 ; U1.31@115.078,73.09 ccw(c114.01,72.022) 114.01,73.532 ccw(c114.01,75.042) U1.31@115.078,73.974 ; U1.31@115.258,73.269 ccw(c114.624,72.635) 114.624,73.532 ccw(c114.624,74.429) U1.31@115.258,73.795 ; U1.31@115.82,73.532 108.204,73.532 102.871,68.199 U1.12@100.584,68.199 100.279,68.199 99.136,69.342 99.136,83.541 98.4,84.277 92.38,84.277 91.821,84.836 ; GND.1@125.361,40.64 cw(c123.857,40.64) 124.92,39.576 cw(c125.984,38.513) GND.1@125.984,40.017 ; GND.1@125.615,40.64 cw(c124.724,40.64) 125.354,40.01 cw(c125.984,39.38) GND.1@125.984,40.271 ; 91.821,84.836 cw(c92.126,84.836) 92.027,85.124 ccw(c92.126,84.836) 91.821,84.836 ; 91.821,84.836 ccw(c91.516,84.836) 91.615,85.124 cw(c91.516,84.836) 91.821,84.836
  Bottom Layer w0.254: 55.472,53.296 ccw(c54.191,54.577) RST.2@56.001,54.664 ; 55.541,45.926 cw(c54.05,44.435) RC0.1@56.158,44.435 ; 55.866,53.689 cw(c56.673,52.882) RST.2@56.673,54.024 ; 55.878,53.702 ccw(c54.965,54.615) RST.2@56.254,54.677 ; 55.974,45.492 cw(c54.918,44.435) RC0.1@56.412,44.435 ; 56.024,45.443 ccw(c56.831,46.25) RC0.1@56.831,45.108 ; v1@56.029,80.75 ccw(c55.162,81.617) 56.388,81.617 ccw(c57.614,81.617) v1@56.747,80.75 ; v1(56.388,80.391) 56.388,92.456 KEY1.5@57.912,93.98 ; RST.2@56.873,54.697 55.372,53.196 55.372,46.094 RC0.1@57.031,44.435 ; KEY1.5@57.114,93.98 cw(c55.187,93.98) 56.55,92.618 cw(c57.912,91.255) KEY1.5@57.912,93.182 ; KEY1.5@57.368,93.98 cw(c56.055,93.98) 56.983,93.051 cw(c57.912,92.123) KEY1.5@57.912,93.436 ; RC0.1@63.555,43.959 cw(c62.406,42.81) 64.031,42.81 cw(c65.656,42.81) RC0.1@64.507,43.959 ; RC0.1@63.735,44.139 cw(c63.019,43.424) 64.031,43.424 cw(c65.043,43.424) RC0.1@64.327,44.139 ; RST.2@63.873,54.697 73.926,54.697 76.886,57.657 76.886,63.347 77.038,63.499 ; RC0.1@64.031,44.435 64.031,38.959 RC1.1@65.667,37.323 ; 64.177,38.814 cw(c62.686,37.323) RC1.1@64.794,37.323 ; RST.2@64.369,54.401 cw(c65.085,53.685) 65.085,54.697 cw(c65.085,55.708) RST.2@64.369,54.993 ; RST.2@64.549,54.221 cw(c65.698,53.072) 65.698,54.697 cw(c65.698,56.322) RST.2@64.549,55.173 ; 64.61,38.38 cw(c63.554,37.323) RC1.1@65.048,37.323 ; 64.66,38.331 ccw(c65.467,39.138) RC1.1@65.467,37.996 ; v1@74.825,63.858 ccw(c73.958,64.725) 75.184,64.725 ccw(c76.41,64.725) v1@75.543,63.858 ; LED1.2@74.825,70.761 cw(c73.958,69.894) 75.184,69.894 cw(c76.41,69.894) LED1.2@75.543,70.761 ; v1(75.184,63.499) LED1.2@75.184,71.12 76.708,72.644 C2.1@76.708,78.994 ; LED1.2@75.184,71.628 ccw(c75.184,72.854) 76.051,71.987 ccw(c76.918,71.12) LED1.2@75.692,71.12 ; C2.1@76.267,78.553 cw(c75.204,77.49) 76.708,77.49 cw(c78.212,77.49) C2.1@77.149,78.553 ; C2.1@76.447,78.733 cw(c75.817,78.103) 76.708,78.103 cw(c77.599,78.103) C2.1@76.969,78.733 ; U2.15@77.675,63.19 ccw(c77.038,62.688) 77.038,63.499 ; U2.15@77.675,63.808 cw(c77.038,64.31) 77.038,63.499 ; U2.15@78.743,63.147 cw(c79.593,62.297) 79.593,63.499 cw(c79.593,64.701) U2.15@78.743,63.851 ; CX1.2@81.928,62.805 ccw(c80.865,61.742) 80.865,63.246 ccw(c80.865,64.75) 81.928,63.687 ccw(c80.865,64.75) 82.369,64.75 ccw(c83.873,64.75) CX1.2@82.81,63.687 ; CX2.2@81.928,66.107 cw(c80.865,65.044) 82.369,65.044 cw(c83.873,65.044) CX2.2@82.81,66.107 ; CX1.2@82.108,62.985 ccw(c81.478,62.355) 81.478,63.246 ccw(c81.478,64.137) 82.108,63.507 ccw(c81.478,64.137) 82.369,64.137 ccw(c83.26,64.137) CX1.2@82.63,63.507 ; CX2.2@82.108,66.287 cw(c81.478,65.657) 82.369,65.657 cw(c83.26,65.657) CX2.2@82.63,66.287 ; CX2.2@82.369,66.548 CX1.2@82.369,63.246 80.415,63.246 80.162,63.499 U2.15@78.228,63.499 77.038,63.499 ; v1(83.439,78.994) 84.582,80.137 v1(84.582,88.011) ; v1@83.439,79.502 ccw(c83.439,80.728) 84.306,79.861 ccw(c85.173,78.994) v1@83.947,78.994 ; v1@84.223,87.652 cw(c83.356,86.785) 84.582,86.785 cw(c85.808,86.785) v1@84.941,87.652 ; J1.5@85.91,90.847 cw(c85.4,90.091) 86.312,90.091 ; J1.5@86.052,91.057 cw(c85.723,90.569) 86.312,90.569 cw(c86.901,90.569) J1.5@86.572,91.057 ; C6.1@86.292,88.46 ccw(c85.208,89.544) 86.741,89.544 ccw(c88.274,89.544) C6.1@87.19,88.46 ; J1.5@86.312,91.442 86.312,90.091 ; C6.1@86.472,88.28 ccw(c85.821,88.931) 86.741,88.931 ccw(c87.661,88.931) C6.1@87.01,88.28 ; J1.5@86.714,90.847 ccw(c87.224,90.091) 86.312,90.091 ; C6.1@86.741,88.011 86.741,89.662 86.312,90.091 ; GND.1@125.543,41.081 ccw(c124.48,42.144) 125.984,42.144 ccw(c127.488,42.144) GND.1@126.425,41.081 ; GND.2@125.543,42.739 cw(c124.48,41.676) 125.984,41.676 cw(c127.488,41.676) GND.2@126.425,42.739 ; GND.2@125.543,43.621 ccw(c124.48,44.684) 125.984,44.684 ccw(c127.488,44.684) GND.2@126.425,43.621 ; GND.3@125.543,45.279 cw(c124.48,44.216) 125.984,44.216 cw(c127.488,44.216) GND.3@126.425,45.279 ; GND.3@125.543,46.161 ccw(c124.48,47.224) 125.984,47.224 ccw(c127.488,47.224) GND.3@126.425,46.161 ; GND.4@125.543,47.819 cw(c124.48,46.756) 125.984,46.756 cw(c127.488,46.756) GND.4@126.425,47.819 ; GND.1@125.723,40.901 ccw(c125.093,41.531) 125.984,41.531 ccw(c126.875,41.531) GND.1@126.245,40.901 ; GND.2@125.723,42.919 cw(c125.093,42.289) 125.984,42.289 cw(c126.875,42.289) GND.2@126.245,42.919 ; GND.2@125.723,43.441 ccw(c125.093,44.071) 125.984,44.071 ccw(c126.875,44.071) GND.2@126.245,43.441 ; GND.3@125.723,45.459 cw(c125.093,44.829) 125.984,44.829 cw(c126.875,44.829) GND.3@126.245,45.459 ; GND.3@125.723,45.981 ccw(c125.093,46.611) 125.984,46.611 ccw(c126.875,46.611) GND.3@126.245,45.981 ; GND.4@125.723,47.999 cw(c125.093,47.369) 125.984,47.369 cw(c126.875,47.369) GND.4@126.245,47.999 ; GND.1@125.984,40.64 GND.2@125.984,43.18 GND.3@125.984,45.72 GND.4@125.984,48.26
pads on no net: J1.1 J1.4 J1.6 J1.7 J1.8 J1.9 J1.10 J1.11 KEY1.3 KEY1.4 U2.7 U2.8 U2.9 U2.10 USB.2 USB.3 USB.5 USB.6

## Polygon pours and split planes (outlines as drawn)
no net on Top Layer (hatched 45Degree grid 0.508 track 0.203): 55.97,102.235 135.726,102.235 136.869,101.094 136.869,37.336 135.599,36.068 55.97,36.068 55.081,36.955 55.081,101.382 55.115,101.382
no net on Top Layer (hatched 45Degree grid 0.508 track 0.203): 54.991,101.346 55.894,102.249 56.007,102.362
no net on Bottom Layer (hatched 45Degree grid 0.508 track 0.203): 56.123,102.362 135.752,102.362 137.022,101.092 137.022,37.465 135.752,36.195 56.123,36.195 55.234,37.084 55.234,101.473

## Silkscreen, mask and mechanical layers (free items; w line width, h text height)
Top Overlay:
  text "RA0" at 121.158,94.869 h1.02
  text "RB7" at 129.794,94.488 h1.02
  text "RA1" at 121.158,92.456 h1.02
  text "RB6" at 129.794,92.075 h1.02
  text "PIC16F877A" at 107.823,90.043 h1.02 r270
  text "RA2" at 121.158,89.916 h1.02
  text "RB5" at 129.794,89.535 h1.02
  text "+5V" at 55.753,88.646 h1.02 r270
  text "RA3" at 121.158,87.376 h1.02
  text "RB4" at 129.794,86.868 h1.02
  text "RA4" at 121.158,84.836 h1.02
  text "RB3" at 129.794,84.328 h1.02
  text "GND" at 55.88,84.074 h1.02 r270
  text "RA5" at 121.158,82.296 h1.02
  text "RB2" at 129.794,81.788 h1.02
  text "RE0" at 121.158,79.629 h1.02
  text "RB1" at 129.794,79.121 h1.02
  text "RE1" at 121.158,77.216 h1.02
  text "RB0" at 129.794,76.581 h1.02
  text "RE2" at 121.158,74.676 h1.02
  text "RC7" at 121.285,70.231 h1.02
  text "RD7" at 129.794,70.231 h1.02
  text "RC6" at 121.285,67.691 h1.02
  text "RD6" at 129.794,67.691 h1.02
  text "RD5" at 129.794,65.151 h1.02
  text "RC5" at 121.285,65.024 h1.02
  text "RD4" at 129.794,62.611 h1.02
  text "RC4" at 121.285,62.484 h1.02
  text "MAX232" at 73.914,60.325 h1.02 r270
  text "RC3" at 121.285,60.071 h1.02
  text "RD3" at 129.794,60.071 h1.02
  text "RC2" at 121.285,57.531 h1.02
  text "RD2" at 129.794,57.531 h1.02
  text "RC1" at 121.285,54.991 h1.02
  text "RD1" at 129.794,54.991 h1.02
  text "RC0" at 121.412,52.324 h1.02
  text "RD0" at 129.794,52.324 h1.02
  text "GND" at 121.285,45.339 h1.02
  text "VCC" at 129.921,45.212 h1.02
  text "GND" at 121.285,42.799 h1.02
  text "VCC" at 129.921,42.545 h1.02
  text "GND" at 121.285,40.259 h1.02
  text "SN:090701" at 121.412,36.703 h1.02
Mechanical 1:
  lines w0.254: 54.61,36.83 54.61,101.6 55.753,102.743 55.88,102.87 135.89,102.87 137.287,101.473 137.287,37.084 135.89,35.687 55.753,35.687 54.61,36.83

## Text inside footprints (layer, text, board x,y; h text height)
J1: Top Overlay "6" at 76.117,97.387 h1.02; Top Overlay "9" at 84.427,97.387 h1.02; Top Overlay "5" at 88.265,90.932 h1.02; Top Overlay "1" at 72.771,90.932 h1.02